# Altium PCB PCB1.PcbDoc
Units mm, origin at the board's own origin, x right, y up, seen from the top; angles counter-clockwise.
Board outline 12.9 x 16.7 mm, 2 copper layers (Top Layer, Bottom Layer); 5 components, 11 nets, 36 pads, 9 vias.
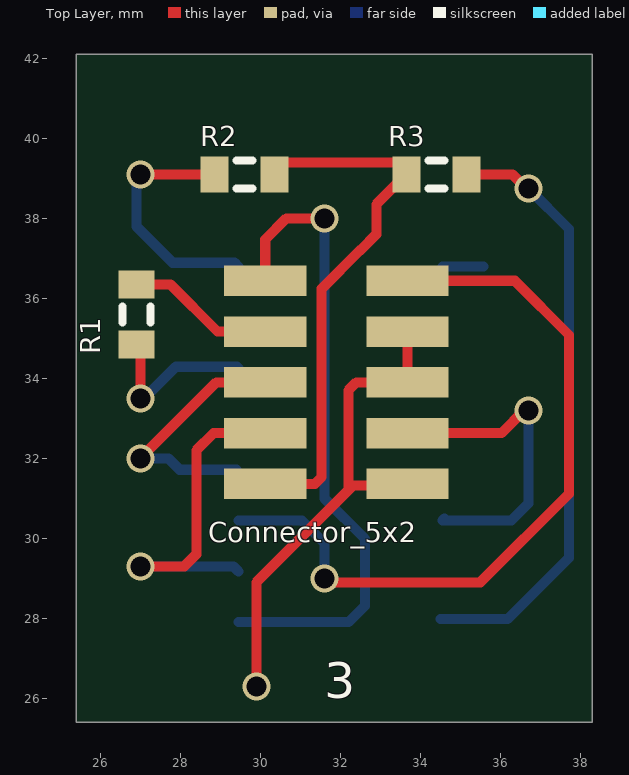
[diagram p0: Top Layer view]
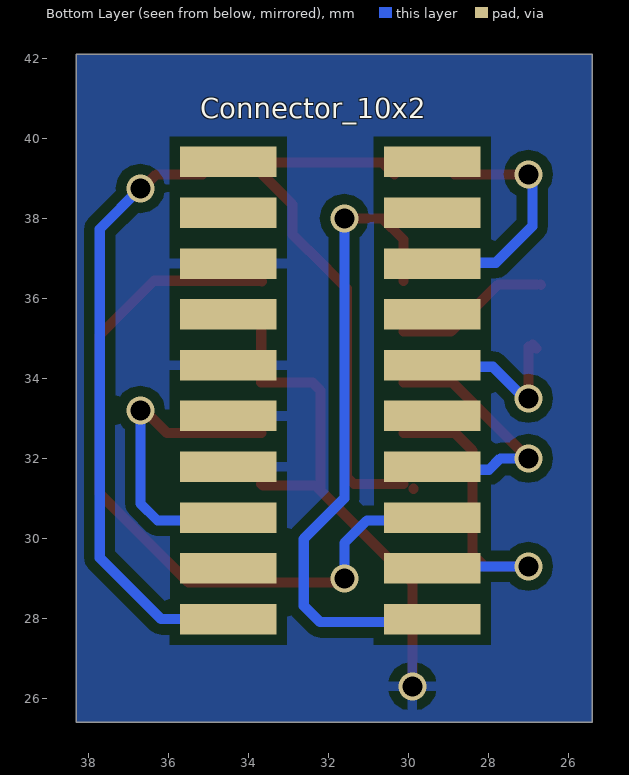
[diagram p1: Bottom Layer view, seen from below]

## Layer stack, top to bottom
Top Solder: solder mask 0.0102, Solder Resist, Dk 3.5
Top Layer: signal copper 0.0356
Dielectric 1: dielectric 0.32, FR-4, Dk 4.8
Bottom Layer: signal copper 0.0356
Bottom Solder: solder mask 0.0102, Solder Resist, Dk 3.5

## Board outline
25.4,25.4 38.3,25.4 38.3,42.1 25.4,42.1
cut-out: 130.175,97.155

## Design rules (kind name [scope] priority, off if disabled: settings)
Clearance [All] p1: gap=0.254 ignorepadtopadclearanceinfootprint=TRUE except(0: Arc-Hole Track-Hole SMDPad-Hole THPad-Hole Via-Hole Fill-Hole Poly-Hole Region-Hole Text-Hole)
PolygonConnect [All] p1: connectstyle=Relief reliefconductorwidth=0.254 reliefentries=4 polygonreliefangle="90 Angle" airgapwidth=0.254
RoutingVias [All] p1: holewidth=0.711 width=1.27 viastyle="Through Hole" minholewidth=0.711 minwidth=1.27 maxholewidth=0.711 maxwidth=1.27
SolderMaskExpansion [All] p1: expansion=0.102
Width [All] p1: maxlimit=0.254 minlimit=0.254 preferedwidth=0.254
30 further rules are at their usual default settings.

## Components (designator, comment, footprint, x,y, rotation, side; value= is the part's Value field where it differs from the comment)
Connector_5x2 "Connector_5x2" "5x2 pin" 31.9,33.9 r270 top
Connector_10x2 "XDS110 connector" "10x2 pin" 29.4,27.98 r90 bottom
R1 "RC0805JR-070RL" J1-0603 26.9,35.6 r270 top value=0
R2 "RC0805JR-070RL" J1-0603 29.6,39.1 r180 top value=0
R3 "RC0805JR-070RL" J1-0603 34.4,39.1 r0 top value=0

## Footprints (in the part's own frame and the unit in brackets; to place one, negate y for a bottom-side part, rotate by r counter-clockwise, add the part's x,y. Pads: shape width x height; smd on the part's side, far side on the other; paste and mask are expansions set on the pad)
"5x2 pin" [mil]
  rect 30x81 smd: 1(-100,70) 2(-100,-70) 3(-50,70) 4(-50,-70) 5(0,70) 6(0,-70) 7(50,70) 8(50,-70) 9(100,70) 10(100,-70)
"10x2 pin" [mil]
  rect 30x95 smd: 1(0,0) 2(0,200.79) 3(50,0) 4(50,200.79) 5(100,0) 6(100,200.79) 7(150,0) 8(150,200.79) 9(200,0) 10(200,200.79) 11(250,0) 12(250,200.79) 13(300,0) 14(300,200.79) 15(350,0) 16(350,200.79) 17(400,0) 18(400,200.79) 19(450,0) 20(450,200.79)
  body extent -24,-50 476,246, height 340
J1-0603 [mm] "Chip Resistor, Body 1.6x0.8mm, IPC High Density"
  rect 0.7x0.9 smd: 1(-0.75,0) 2(0.75,0)
  silkscreen extent -0.2,-0.35 0.2,0.35, body extent -0.85,-0.48 0.85,0.48, height 0.9

## Part data
R1 R2 R3: library part Res3, "Resistor", LatestRevisionDate=29-May-2009, LatestRevisionNote="IPC-7351 Footprint Added.", PackageDescription="Chip Resistor", PackageReference=J1-0603, Published=8-Jun-2000, Publisher="Altium Limited"

## Via types
v1: diameter 0.7, hole 0.5, Top Layer to Bottom Layer, 9 vias

## Nets (pads, with @x,y where several pads share a name; then routed paths per layer and width w, separated by ;. In a path a pad name is that pad's centre, name@x,y a point inside that pad or via, vN(x,y) a via of type N, cw(c..) or ccw(c..) an arc to the next point about the centre after c; other vN are vias at no path point)
GND: Connector_5x2.3 Connector_5x2.5 Connector_5x2.9 Connector_10x2.8 Connector_10x2.10 Connector_10x2.12 Connector_10x2.16 | length 13.7
  Top Layer w0.254: v1(29.9,26.3) 29.9,28.9 32.2,31.2 ; Connector_5x2.9 33.635,31.317 32.317,31.317 32.2,31.2 ; Connector_5x2.3 Connector_5x2.5 32.4,33.9 32.2,33.7 32.2,31.2
  Bottom Layer w0.254: Connector_10x2.16@34.55,36.795 Connector_10x2.16@35.572,36.795
Key: Connector_5x2.7 Connector_10x2.6 | length 8
  Top Layer w0.254: Connector_5x2.7 36.03,32.63 36.6,33.2 v1@36.65,33.2
  Bottom Layer w0.254: Connector_10x2.6@34.605,30.5 34.55,30.445 36.272,30.445 36.7,30.873 36.7,33.15 v1@36.65,33.2
  other v1: 36.7,33.2
NetConnector_10x2_2: Connector_10x2.2 R3.2 | length 15.2
  Top Layer w0.254: R3.2 36.3,39.1 36.5,38.9 36.548,38.9 v1(36.7,38.748)
  Bottom Layer w0.254: Connector_10x2.2 36.18,27.98 37.716,29.516 37.716,37.732 v1(36.7,38.748)
NetConnector_10x2_11: Connector_10x2.11 R1.2 | length 4.4
  Top Layer w0.254: R1.2@26.8,34.75 R1.2 R1.2@26.9,34.75 ; v1(27,33.5) R1.2@27,34.8
  Bottom Layer w0.254: v1@27,33.4 27.889,34.289 29.416,34.289 Connector_10x2.11@29.45,34.255
NetConnector_10x2_15: Connector_10x2.15 R2.2 | length 5.6
  Top Layer w0.254: v1@27.2,39.1 R2.2
  Bottom Layer w0.254: v1@26.9,38.8 26.9,37.8 27.811,36.889 29.356,36.889 Connector_10x2.15@29.45,36.795
  other v1: 27,39.1
nRESET: Connector_5x2.10 R2.1 R3.1 | length 13.5
  Top Layer w0.254: Connector_5x2.10 31.36,31.36 31.532,31.532 31.532,36.242 32.491,37.202 32.502,37.202 32.9,37.6 32.9,38.35 R3.1 33.35,39.4 30.65,39.4 R2.1
TCK: Connector_5x2.4 R1.1 | length 3.8
  Top Layer w0.254: R1.1@26.68,36.33 R1.1@26.7,36.35 ; R1.1@26.8,36.35 R1.1 27.75,36.35 28.93,35.17 Connector_5x2.4
TDI: Connector_5x2.8 Connector_10x2.3 | length 8.5
  Top Layer w0.254: v1(27,29.3) 28.1,29.3 28.4,29.6 28.4,32.2 28.83,32.63 Connector_5x2.8
  Bottom Layer w0.254: v1(27,29.3) 29.325,29.3 Connector_10x2.3@29.45,29.175
TDO: Connector_5x2.6 Connector_10x2.7 | length 6.4
  Top Layer w0.254: v1(27,32) 28.9,33.9 Connector_5x2.6
  Bottom Layer w0.254: v1(27,32) 27.7,32 27.985,31.715 Connector_10x2.7@29.4,31.715
TMS: Connector_5x2.2 Connector_10x2.1 | length 16.2
  Top Layer w0.254: Connector_5x2.2 30.122,37.472 30.65,38 v1(31.6,38)
  Bottom Layer w0.254: Connector_10x2.1@29.45,27.905 32.205,27.905 32.616,28.316 32.616,29.987 31.6,31.003 v1(31.6,38)
VTref: Connector_5x2.1 Connector_10x2.5 | length 19
  Top Layer w0.254: v1@31.6,28.9 35.5,28.9 37.716,31.116 37.716,35.084 36.36,36.44 Connector_5x2.1 Connector_5x2.1@33.655,36.417
  Bottom Layer w0.254: Connector_10x2.5@29.45,30.445 31.037,30.445 31.6,29.882 v1(31.6,29) v1@31.6,28.9
pads on no net: Connector_10x2.4 Connector_10x2.9 Connector_10x2.13 Connector_10x2.14 Connector_10x2.17 Connector_10x2.18 Connector_10x2.19 Connector_10x2.20

## Polygon pours and split planes (outlines as drawn)
GND on Bottom Layer "Bottom Layer-GND" (solid, pour order 2): 25.4,42.1 38.3,42.1 38.3,25.4 25.4,25.4

## Silkscreen, mask and mechanical layers (free items; w line width, h text height)
Top Overlay:
  text "3" at 31.6,25.7 h1.52
Mechanical 1:
  the board outline again, w0.1